# Altium PCB logger_layout.PcbDoc
Units mil, origin at the board's own origin, x right, y up, seen from the top; angles counter-clockwise.
Board outline 600 x 600 mil, 4 copper layers (Top Layer, Layer 1, Layer 2, Bottom Layer), stack 23.756 mil thick; 42 components, 77 nets, 172 pads, 1 vias.
Unrouted connection lines stored in the file: 65.
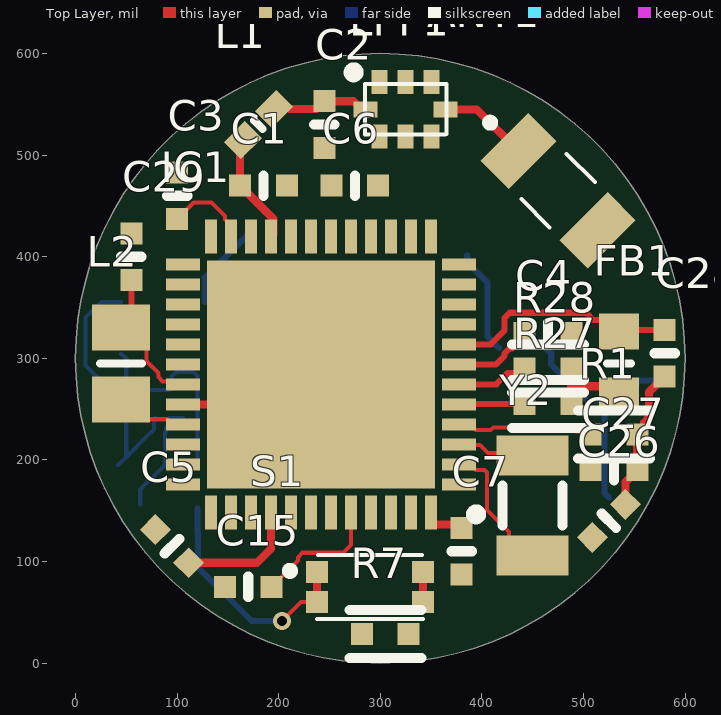
[diagram p0: Top Layer view]
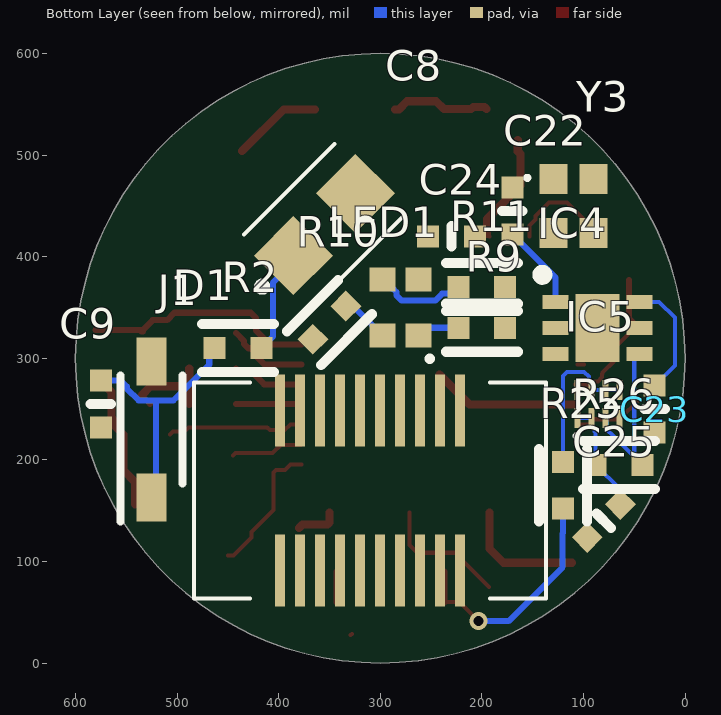
[diagram p1: Bottom Layer view, seen from below]
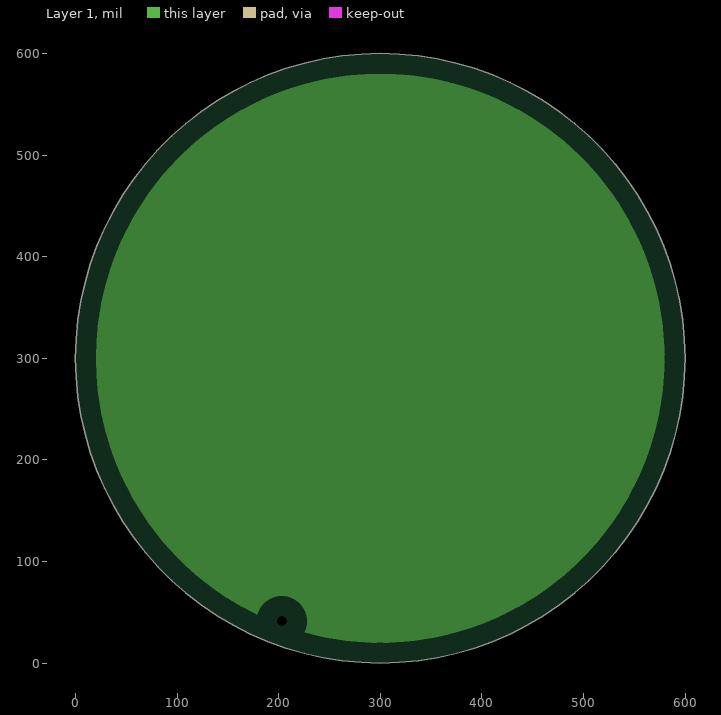
[diagram p2: Layer 1, clearances drawn from the general rule]
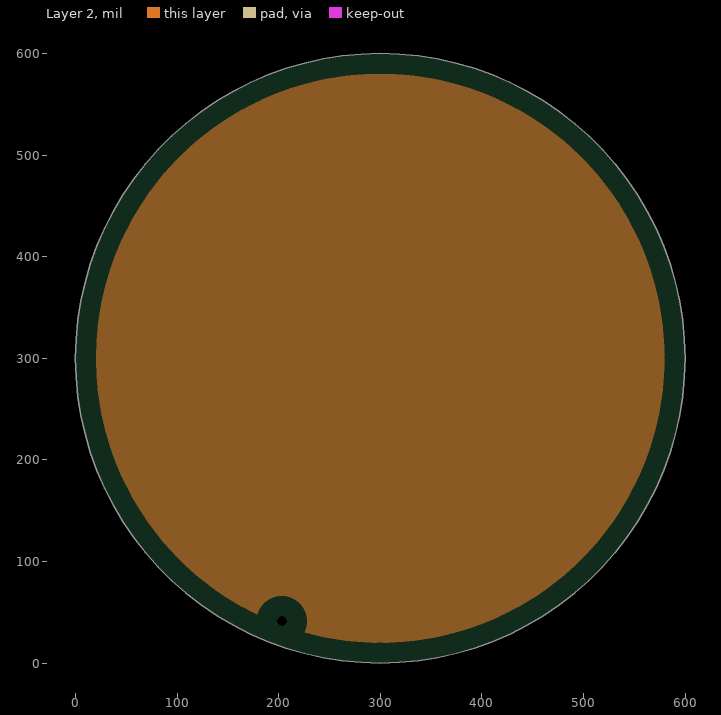
[diagram p3: Layer 2, clearances drawn from the general rule]

## Layer stack, top to bottom
Top Solder: solder mask 0.4, Solder Resist, Dk 3.5
Top Layer: signal copper 1.4
Dielectric 2: prepreg 2.8, PP-006, Dk 4.1
Layer 1: plane copper 1.378
Dielectric 1: dielectric 12.6, FR-4, Dk 4.8
Layer 2: plane copper 1.378
Dielectric 3: prepreg 2.8, PP-006, Dk 4.1
Bottom Layer: signal copper 1.4
Bottom Solder: solder mask 0.4, Solder Resist, Dk 3.5

## Board outline
300,0 cw(c300,300) 0,300 cw(c300,300) 300,600 cw(c300,300) 600,300 cw(c300,300)

## Design rules (kind name [scope] priority, off if disabled: settings)
Clearance [All] p1: gap=6 ignorepadtopadclearanceinfootprint=FALSE except(0: Arc-Hole Track-Hole SMDPad-Hole THPad-Hole Via-Hole Fill-Hole Poly-Hole Region-Hole Text-Hole)
PlaneClearance [All] p1: clearance=20
PlaneConnect [All] p1: planeconnectstyle=Relief reliefexpansion=20 reliefentries=4 reliefconductorwidth=10 reliefairgap=10
PolygonConnect [All] p1: connectstyle=Relief reliefconductorwidth=10 reliefentries=4 polygonreliefangle="90 Angle" airgapwidth=10
RoutingVias [All] p1: holewidth=9.84 width=15.75 viastyle="Through Hole" minholewidth=9.84 minwidth=15.75 maxholewidth=13.78 maxwidth=27.56
SolderMaskExpansion [All] p1: expansion=4 istentingtop=FALSE
Width [All] p1: maxlimit=8 minlimit=4 preferedwidth=6 minimp=50.000000 maximp=50.000000 favimp=50.000000
28 further rules are at their usual default settings.

## Classes and differential pairs
component class logger_connector: J1
component class logger_periph: C26 C27 C28 C29 FB1 L2 R27 R28 Y2 Y3
component class logger_sensors: C15 LED1 R7 R9 R10 R11
component class logger_power: C22 C23 C24 C25 IC4 IC5 R25 R26 S1
component class logger_mcu: ANT1 C1 C2 C3 C4 C5 C6 C7 C8 C9 D1 IC1 L1 LPF1 R1 R2

## Components (designator, comment, footprint, x,y, rotation, side; value= is the part's Value field where it differs from the comment)
ANT1 "2119640001" 2119640001 475,465 r135 top
C1 "0.80pF" SMD-0402C 185,470 r90 top
C2 "0.30pF" SMD-0402C 245,530 r180 top
C3 "0.10µF" SMD-0402C 100,460 r180 top
C4 "0.10µF" SMD-0402C 465,325 r90 top
C5 "0.10µF" SMD-0402C 95,115 r225 top
C6 "0.10µF" SMD-0402C 275,470 r90 top
C7 "100pF" SMD-0402C 380,110 r0 top
C8 "CPH3225A" CPH3225A 355,415 r135 bottom
C9 "0.10µF" SMD-0402C 575,255 r180 bottom
C15 "10000pF" SMD-0402C 170,75 r90 top
C22 "1µF" SMD-0402C 170,445 r0 bottom
C23 "1µF" SMD-0402C 30,250 r180 bottom
C24 "1µF" SMD-0402C 230,420 r270 bottom
C25 "10000pF" SMD-0402C 80,140 r45 bottom
C26 "15pF" SMD-0402C 525,140 r135 top
C27 "15pF" SMD-0402C 530,190 r90 top
C28 "0.10µF" SMD-0402C 580,305 r0 top
C29 "4.7µF" SMD-0402C 55,400 r180 top
D1 "1N5819HW-7-F" SOD3716X145N 525,230 r90 bottom
FB1 "BLM18KG601SZ1D" BEADC1608X95N 535,295 r270 top
IC1 "STM32WB55CGU6" QFN50P700X700X65-49N-D 241.73,284.17 r180 top
IC4 "NCP718BMT330TBG" SON65P200X200X80-7N 86.34,330 r180 bottom
IC5 "74LVC2G00GS,115" 74AXP2T3407GSX 85,255 r180 bottom
J1 "0529910208" 0529910208 310,170 r180 bottom
L1 "LQG15HS2N7S02D" INDC1005X55N 180,530 r45 top
L2 "LBR2012T100K" INDC2012X145N 45,295 r90 top
LED1 "EAST1616RGBB6" EAST1616RGBB6 280,350 r180 bottom
LPF1 "LFL212G45TC1A007" LFL212G45TC1A007 325,545 r0 top
R1 "100k" SMD-0402-RES 530,225 r270 top
R2 "100" SMD-0402-RES 440,310 r270 bottom
R7 "1k" SMD-0402-RES 305,28.62 r90 top
R9 "110" SMD-0402-RES 200,330 r270 bottom
R10 "30" SMD-0402-RES 350,335 r45 bottom
R11 "24" SMD-0402-RES 200,370 r90 bottom
R25 "100k" SMD-0402-RES 120,175 r180 bottom
R26 "100k" SMD-0402-RES 65,195 r90 bottom
R27 "10k" SMD-0402-RES 465,255 r90 top
R28 "10k" SMD-0402-RES 465,290 r90 top
S1 "EVP-BB4A9B000" EVPBB2A9B000 280,75 r0 top
Y2 "NX3215SA-32.768K-STD-MUA-8" NX3215SA 450,155 r90 top
Y3 "XRCGB32M000F1H01R0" XRCGB32M000F1H01R0 110,450 r270 bottom

## Footprints (in the part's own frame and the unit in brackets; to place one, negate y for a bottom-side part, rotate by r counter-clockwise, add the part's x,y. Pads: shape width x height; smd on the part's side, far side on the other; paste and mask are expansions set on the pad)
74AXP2T3407GSX [mm]
  rect 0.15x0.5 smd: 1(-0.525,-0.35) 2(-0.175,-0.35) 3(0.175,-0.35) 4(0.525,-0.35) 5(0.525,0.35) 6(0.175,0.35) 7(-0.175,0.35) 8(-0.525,0.35)
  silkscreen extent -0.6,-0.85 -0.5,-0.75, body extent -0.67,-0.5 0.67,0.5, height 0.45
0529910208 [mm]
  rect 0.25x1.8 smd: 1(-2.25,-2) 2(-2.25,2) 3(-1.75,-2) 4(-1.75,2) 5(-1.25,-2) 6(-1.25,2) 7(-0.75,-2) 8(-0.75,2) 9(-0.25,-2) 10(-0.25,2) 11(0.25,-2) 12(0.25,2) 13(0.75,-2) 14(0.75,2) 15(1.25,-2) 16(1.25,2) 17(1.75,-2) 18(1.75,2) 19(2.25,-2) 20(2.25,2)
  silkscreen extent -4.4,-2.7 4.4,2.7, body extent -4.4,-2.7 4.4,2.7, height 2.28
2119640001 [mm]
  rect 1x1.7 smd: 1(1.4,0) 2(-1.4,0)
  silkscreen extent -0.5,-0.8 2.5,0.8
BEADC1608X95N [mm]
  rect 0.9x1 smd: 1(-0.8,0) 2(0.8,0)
  silkscreen extent 0,-0.3 0,0.3, body extent -0.8,-0.4 0.8,0.4, height 0.95
CPH3225A [mm]
  rect 1.4x1.4 smd: 1(-0.8,0.3) 2(1.4,0.3)
  silkscreen extent -2,-0.95 1.9,1.55, body extent -1.36,-0.95 1.96,1.55, height 1.1
EAST1616RGBB6 [mm]
  rect 0.65x0.6 smd: 1(0.45,-0.7) 2(0.45,0.7) 3(-0.45,-0.7) 4(-0.45,0.7)
  silkscreen extent 0.73,-1.28 0.73,-1.28, body extent -0.79,-0.79 0.81,0.81, height 0.46
EVPBB2A9B000 [mm]
  rect 0.55x0.55 smd: 1(-1.075,0.375) 2(-1.075,-0.375) 3(1.575,-0.375) 4(1.575,0.375)
  silkscreen extent -1.85,-0.8 1.58,0.8
INDC1005X55N [mm]
  rect 0.75x0.6 smd: 1(-0.55,0) 2(0.55,0)
  silkscreen extent 0,-0.15 0,0.15, body extent -0.5,-0.25 0.5,0.25, height 0.55
INDC2012X145N [mm]
  rect 1.15x1.45 smd: 1(-0.9,0) 2(0.9,0)
  silkscreen extent 0,-0.53 0,0.53, body extent -1,-0.63 1,0.63, height 1.45
LFL212G45TC1A007 [mm]
  rect 0.4x0.6 smd: 1(-0.65,0.685) 2(0,0.685) 3(0.65,0.685) 5(0.65,-0.685) 6(0,-0.685) 7(-0.65,-0.685)
  rect 0.6x0.4 smd: 4(1,0) 8(-1,0)
  silkscreen extent -1.42,-0.64 1.02,1.05, body extent -1,-0.5 1,0.45, height 0.87
NX3215SA [mm]
  rect 1x1.8 smd: 1(-1.25,0) 2(1.25,0)
  silkscreen extent -0.5,-0.75 0.5,0.75
QFN50P700X700X65-49N-D [mm]
  rect 0.85x0.3 smd: 1(-3.45,2.75) 2(-3.45,2.25) 3(-3.45,1.75) 4(-3.45,1.25) 5(-3.45,0.75) 6(-3.45,0.25) 7(-3.45,-0.25) 8(-3.45,-0.75) 9(-3.45,-1.25) 10(-3.45,-1.75) 11(-3.45,-2.25) 12(-3.45,-2.75) 25(3.45,-2.75) 26(3.45,-2.25) 27(3.45,-1.75) 28(3.45,-1.25) 29(3.45,-0.75) 30(3.45,-0.25) 31(3.45,0.25) 32(3.45,0.75) 33(3.45,1.25) 34(3.45,1.75) 35(3.45,2.25) 36(3.45,2.75)
  rect 0.3x0.85 smd: 13(-2.75,-3.45) 14(-2.25,-3.45) 15(-1.75,-3.45) 16(-1.25,-3.45) 17(-0.75,-3.45) 18(-0.25,-3.45) 19(0.25,-3.45) 20(0.75,-3.45) 21(1.25,-3.45) 22(1.75,-3.45) 23(2.25,-3.45) 24(2.75,-3.45) 37(2.75,3.45) 38(2.25,3.45) 39(1.75,3.45) 40(1.25,3.45) 41(0.75,3.45) 42(0.25,3.45) 43(-0.25,3.45) 44(-0.75,3.45) 45(-1.25,3.45) 46(-1.75,3.45) 47(-2.25,3.45) 48(-2.75,3.45)
  rect 5.7x5.7 smd: 49(0,0)
  silkscreen extent -4,3.38 -3.75,3.62, body extent -3.55,-3.55 3.55,3.55, height 0.65
SMD-0402-RES [mm]
  rect 0.55x0.55 smd: 1(0,0.584) 2(0,-0.584)
  silkscreen extent -0.6,-0.9 0.6,0.9, body extent -0.28,-0.57 0.27,0.58, height 0.41
SMD-0402C [mm]
  rect 0.55x0.55 smd: 1(0,0.584) 2(0,-0.584)
  silkscreen extent -0.25,0 0.25,0, body extent -0.25,-0.51 0.25,0.51, height 0.51
SOD3716X145N [mm]
  rect 1.2x0.75 smd: 1(-1.7,0) 2(1.7,0)
  silkscreen extent -2.3,-0.77 1.35,0.77, body extent -1.85,-0.77 1.85,0.77, height 1.45
SON65P200X200X80-7N [mm]
  rect 0.65x0.35 smd: 1(-1.05,0.65) 2(-1.05,0) 3(-1.05,-0.65) 4(1.05,-0.65) 5(1.05,0) 6(1.05,0.65)
  rect 1.1x1.7 smd: 7(0,0)
  silkscreen extent -1.5,1.2 -1.25,1.45, body extent -1.05,-1 1.05,1, height 0.8
XRCGB32M000F1H01R0 [mm]
  rect 0.75x0.7 smd: 1(-0.675,-0.5) 2(0.675,-0.5) 3(0.675,0.5) 4(-0.675,0.5)
  silkscreen extent -0.75,-1.2 -0.65,-1.1

## Part data
ANT1: "Antenna", Manufacturer_Name=Molex, Mouser Part Number=N/A, Datasheet Link=https://www.molex.com/pdm_docs/sd/2119640001_sd.pdf, Height=1.2mm, Manufacturer_Part_Number=2119640001, Mouser Price/Stock=https://www.mouser.com/Search/Refine.aspx?Keyword=N%2FA
C1: library part GRM1555C1HR80BA01D, "CAP CER 0.8PF 50V NP0 0402", Digi-Key Part Number=490-6269-1-ND, Manufacturer="Murata Electronics North America", Operating Temperature="-55°C ~ 125°C", Package / Case="0402 (1005 Metric)", Ratings=-, Temperature Coefficient="C0G, NP0", Tolerance=±0.1pF, Voltage=50V, @ qty=0, Applications="General Purpose", Datasheets=http://www.murata.com/~/media/webrenewal/support/library/catalog/products/capacitor/mlcc/c02e.pdf, Factory Stock=0, Features=-, Height - Seated (Max)=-, Image=//media.digikey.com/Renders/Murata%20Renders/ZRB-SERIES-0402.jpg, Lead Spacing=-, Lead Style=-, Minimum Quantity=1, Mounting Type="Surface Mount, MLCC", Packaging="Cut Tape (CT)", Part Number=GRM1555C1HR80BA01D, Part Status=Active, Quantity Available=38847, Series=GRM, Size / Dimension="0.039\" L x 0.020\" W (1.00mm x 0.50mm)", Thickness (Max)="0.022\" (0.55mm)", Unit Price (USD)=0.1
C2: library part GRM1555C1HR30WA01D, "CAP CER 0.3PF 50V NP0 0402", Digi-Key Part Number=490-6261-1-ND, Manufacturer="Murata Electronics North America", Operating Temperature="-55°C ~ 125°C", Package / Case="0402 (1005 Metric)", Ratings=-, Temperature Coefficient="C0G, NP0", Tolerance=±0.05pF, Voltage=50V, @ qty=0, Applications="General Purpose", Datasheets=http://www.murata.com/~/media/webrenewal/support/library/catalog/products/capacitor/mlcc/c02e.pdf, Factory Stock=0, Features=-, Height - Seated (Max)=-, Image=//media.digikey.com/Renders/Murata%20Renders/ZRB-SERIES-0402.jpg, Lead Spacing=-, Lead Style=-, Minimum Quantity=1, Mounting Type="Surface Mount, MLCC", Packaging="Cut Tape (CT)", Part Number=GRM1555C1HR30WA01D, Part Status=Active, Quantity Available=61475, Series=GRM, Size / Dimension="0.039\" L x 0.020\" W (1.00mm x 0.50mm)", Thickness (Max)="0.022\" (0.55mm)", Unit Price (USD)=0.16
C3 C4 C5 C6 C9 C28: library part GCM155R71C104KA55D, "CAP CER 0.1UF 16V X7R 0402", Digi-Key Part Number=490-4759-1-ND, Manufacturer="Murata Electronics North America", Operating Temperature="-55°C ~ 125°C", Package / Case="0402 (1005 Metric)", Ratings=AEC-Q200, Temperature Coefficient=X7R, Tolerance=±10%, Voltage=16V, @ qty=0, Applications=Automotive, Datasheets=http://www.murata.com/~/media/webrenewal/support/library/catalog/products/capacitor/mlcc/c03e.ashx, Factory Stock=0, Features=-, Height - Seated (Max)=-, Image=//media.digikey.com/Renders/Murata%20Renders/ZRB-SERIES-0402.jpg, Lead Spacing=-, Lead Style=-, Minimum Quantity=1, Mounting Type="Surface Mount, MLCC", Packaging="Cut Tape (CT)", Part Number=GCM155R71C104KA55D, Part Status=Active, Quantity Available=734194, Series=GCM, Size / Dimension="0.039\" L x 0.020\" W (1.00mm x 0.50mm)", Thickness (Max)="0.022\" (0.55mm)", Unit Price (USD)=0.1
C7: library part GCM1555C1H101JA16D, "CAP CER 100PF 50V NP0 0402", Digi-Key Part Number=490-10669-1-ND, Manufacturer="Murata Electronics North America", Operating Temperature="-55°C ~ 125°C", Package / Case="0402 (1005 Metric)", Ratings=AEC-Q200, Temperature Coefficient="C0G, NP0", Tolerance=±5%, Voltage=50V, @ qty=0, Applications=Automotive, Datasheets=http://www.murata.com/~/media/webrenewal/support/library/catalog/products/capacitor/mlcc/c03e.ashx, Factory Stock=0, Features=-, Height - Seated (Max)=-, Image=//media.digikey.com/Renders/Murata%20Renders/ZRB-SERIES-0402.jpg, Lead Spacing=-, Lead Style=-, Minimum Quantity=1, Mounting Type="Surface Mount, MLCC", Packaging="Cut Tape (CT)", Part Number=GCM1555C1H101JA16D, Part Status=Active, Quantity Available=61397, Series=GCM, Size / Dimension="0.039\" L x 0.020\" W (1.00mm x 0.50mm)", Thickness (Max)="0.022\" (0.55mm)", Unit Price (USD)=0.1
C8: "Capacitor Polarised", Manufacturer_Name="Seiko Instruments Micro Energy", Mouser Part Number=628-CPH3225A, Datasheet Link=https://www.sii.co.jp/en/me/datasheets/chip-capacitor/cph3225a/, Height=1mm, Manufacturer_Part_Number=CPH3225A, Mouser Price/Stock=https://www.mouser.com/Search/Refine.aspx?Keyword=628-CPH3225A
C15 C25: library part GCM155R71H103KA55D, "CAP CER 10000PF 50V X7R 0402", Digi-Key Part Number=490-4762-1-ND, Manufacturer="Murata Electronics North America", Operating Temperature="-55°C ~ 125°C", Package / Case="0402 (1005 Metric)", Ratings=AEC-Q200, Temperature Coefficient=X7R, Tolerance=±10%, Voltage=50V, @ qty=0, Applications=Automotive, Datasheets=http://www.murata.com/~/media/webrenewal/support/library/catalog/products/capacitor/mlcc/c03e.ashx, Factory Stock=0, Features=-, Height - Seated (Max)=-, Image=//media.digikey.com/Renders/Murata%20Renders/ZRB-SERIES-0402.jpg, Lead Spacing=-, Lead Style=-, Minimum Quantity=1, Mounting Type="Surface Mount, MLCC", Packaging="Cut Tape (CT)", Part Number=GCM155R71H103KA55D, Part Status=Active, Quantity Available=650067, Series=GCM, Size / Dimension="0.039\" L x 0.020\" W (1.00mm x 0.50mm)", Thickness (Max)="0.022\" (0.55mm)", Unit Price (USD)=0.1
C22 C23 C24: library part GCM155C71A105KE38D, "CAP CER 1UF 10V X7S 0402", Digi-Key Part Number=490-13409-1-ND, Manufacturer="Murata Electronics North America", Operating Temperature="-55°C ~ 125°C", Package / Case="0402 (1005 Metric)", Ratings=AEC-Q200, Temperature Coefficient=X7S, Tolerance=±10%, Voltage=10V, @ qty=0, Applications=Automotive, Datasheets=http://www.murata.com/~/media/webrenewal/support/library/catalog/products/capacitor/mlcc/c03e.ashx, Factory Stock=0, Features=-, Height - Seated (Max)=-, Image=//media.digikey.com/Renders/Murata%20Renders/ZRB-SERIES-0402.jpg, Lead Spacing=-, Lead Style=-, Minimum Quantity=1, Mounting Type="Surface Mount, MLCC", Packaging="Cut Tape (CT)", Part Number=GCM155C71A105KE38D, Part Status=Active, Quantity Available=7240, Series=GCM, Size / Dimension="0.039\" L x 0.020\" W (1.00mm x 0.50mm)", Thickness (Max)="0.022\" (0.55mm)", Unit Price (USD)=0.12
C26 C27: library part GCM1555C1H150JA16D, "CAP CER 15PF 50V NP0 0402", Digi-Key Part Number=490-11147-1-ND, Manufacturer="Murata Electronics North America", Operating Temperature="-55°C ~ 125°C", Package / Case="0402 (1005 Metric)", Ratings=AEC-Q200, Temperature Coefficient="C0G, NP0", Tolerance=±5%, Voltage=50V, @ qty=0, Applications=Automotive, Datasheets=http://www.murata.com/~/media/webrenewal/support/library/catalog/products/capacitor/mlcc/c03e.ashx, Factory Stock=0, Features=-, Height - Seated (Max)=-, Image=//media.digikey.com/Renders/Murata%20Renders/ZRB-SERIES-0402.jpg, Lead Spacing=-, Lead Style=-, Minimum Quantity=1, Mounting Type="Surface Mount, MLCC", Packaging="Cut Tape (CT)", Part Number=GCM1555C1H150JA16D, Part Status=Active, Quantity Available=6185, Series=GCM, Size / Dimension="0.039\" L x 0.020\" W (1.00mm x 0.50mm)", Thickness (Max)="0.022\" (0.55mm)", Unit Price (USD)=0.1
C29: library part GRM153R60G475ME15D, "CAP CER 4.7UF 4V X5R 0402", Digi-Key Part Number=490-13231-1-ND, Manufacturer="Murata Electronics North America", Operating Temperature="-55°C ~ 85°C", Package / Case="0402 (1005 Metric)", Ratings=-, Temperature Coefficient=X5R, Tolerance=±20%, Voltage=4V, @ qty=0, Applications="General Purpose", Datasheets=http://psearch.en.murata.com/capacitor/product/GRM153R60G475ME15%23.pdf, Factory Stock=0, Features=-, Height - Seated (Max)=-, Image=//media.digikey.com/Renders/Murata%20Renders/ZRB-SERIES-0402.jpg, Lead Spacing=-, Lead Style=-, Minimum Quantity=1, Mounting Type="Surface Mount, MLCC", Packaging="Cut Tape (CT)", Part Number=GRM153R60G475ME15D, Part Status=Active, Quantity Available=9100, Series=GRM, Size / Dimension="0.039\" L x 0.020\" W (1.00mm x 0.50mm)", Thickness (Max)="0.013\" (0.33mm)", Unit Price (USD)=0.27
D1: "Diode", Manufacturer_Name="Diodes Inc.", Mouser Part Number=621-1N5819HW-F, RS Part Number=7082197P, Allied Price/Stock=http://www.alliedelec.com/diodes-inc-1n5819hw-7-f/70437201/, Allied_Number=70437201, Datasheet Link=http://www.diodes.com/_files/datasheets/ds30217.pdf, Height=1.45mm, Manufacturer_Part_Number=1N5819HW-7-F, Mouser Price/Stock=https://www.mouser.com/Search/Refine.aspx?Keyword=621-1N5819HW-F, RS Price/Stock=http://uk.rs-online.com/web/p/products/7082197P
FB1: "Ferrite Bead", Manufacturer_Name="Murata Electronics", Mouser Part Number=81-BLM18KG601SZ1D, Datasheet Link=http://www.murata.com/~/media/webrenewal/support/library/catalog/products/emc/emifil/c31e.ashx?la=en-gb, Height=0.95mm, Manufacturer_Part_Number=BLM18KG601SZ1D, Mouser Price/Stock=https://www.mouser.com/Search/Refine.aspx?Keyword=81-BLM18KG601SZ1D
IC1: "Integrated Circuit", Manufacturer_Name=STMicroelectronics, Mouser Part Number=511-STM32WB55CGU6, Datasheet Link=https://www.st.com/en/microcontrollers/stm32wb55cg.html, Height=0.65mm, Manufacturer_Part_Number=STM32WB55CGU6, Mouser Price/Stock=https://www.mouser.com/Search/Refine.aspx?Keyword=511-STM32WB55CGU6
IC4: "Integrated Circuit", Manufacturer_Name="ON Semiconductor", Mouser Part Number=863-NCP718BMT330TBG, RS Part Number=1861278, Datasheet Link=https://componentsearchengine.com/Datasheets/1/NCP718BMT330TBG.pdf, Height=0.8mm, Manufacturer_Part_Number=NCP718BMT330TBG, Mouser Price/Stock=https://www.mouser.com/Search/Refine.aspx?Keyword=863-NCP718BMT330TBG, RS Price/Stock=http://uk.rs-online.com/web/p/products/1861278
IC5: "Integrated Circuit", Manufacturer_Name=Nexperia, Datasheet Link=https://assets.nexperia.com/documents/data-sheet/74LVC2G00.pdf, Height=0.35mm, Manufacturer_Part_Number=74LVC2G00GS,115
J1: "Connector", Manufacturer_Name=Molex, Datasheet Link=https://www.molex.com/pdm_docs/sd/529910208_sd.pdf, Height=2.47mm, Manufacturer_Part_Number=0529910208
L1: "Inductor", Manufacturer_Name="Murata Electronics", Datasheet Link=https://www.arrow.com/en/products/lqg15hs2n7s02d/murata-manufacturing, Height=0.55mm, Manufacturer_Part_Number=LQG15HS2N7S02D
L2: "Inductor", Manufacturer_Name="TAIYO YUDEN", Mouser Part Number=963-LBR2012T100K, Datasheet Link=https://componentsearchengine.com/Datasheets/2/LBR2012T100K.pdf, Height=1.45mm, Manufacturer_Part_Number=LBR2012T100K, Mouser Price/Stock=https://www.mouser.com/Search/Refine.aspx?Keyword=963-LBR2012T100K
R1: library part ERJ-2RKF1003X, "RES SMD 100K OHM 1% 1/10W 0402", Digi-Key Part Number=P100KLCT-ND, Manufacturer="Panasonic Electronic Components", Operating Temperature="-55°C ~ 155°C", Package / Case="0402 (1005 Metric)", Power (Watts)="0.1W, 1/10W", Supplier Device Package=0402, Temperature Coefficient=±100ppm/°C, Tolerance=±1%, @ qty=1500, Composition="Thick Film", Datasheets=http://industrial.panasonic.com/www-cgi/jvcr13pz.cgi?E+PZ+3+AOA0002+ERJ2RKF1003X+7+WW, Factory Stock=0, Failure Rate=-, Features="Automotive AEC-Q200", Height - Seated (Max)="0.016\" (0.40mm)", Image=//media.digikey.com/Photos/Panasonic%20Photos/ERJ-PA2-Series.jpg, Minimum Quantity=1, Number of Terminations=2, Packaging="Cut Tape (CT)", Part Number=ERJ-2RKF1003X, Part Status=Active, Quantity Available=2645965, Series=ERJ, Size / Dimension="0.039\" L x 0.020\" W (1.00mm x 0.50mm)", Unit Price (USD)=0.00496
R2: library part ERJ-2RKF1003X, "RES SMD 100 OHM 5% 1/4W 0603", Digi-Key Part Number=P100KLCT-ND, Manufacturer="Panasonic Electronic Components", Operating Temperature="-55°C ~ 155°C", Package / Case="0603 (1608 Metric)", Power (Watts)="0.1W, 1/10W", Supplier Device Package=0603, Temperature Coefficient=±100ppm/°C, Tolerance=±1%, @ qty=1500, Composition="Thick Film", Datasheets=http://industrial.panasonic.com/www-cgi/jvcr13pz.cgi?E+PZ+3+AOA0002+ERJ2RKF1003X+7+WW, Factory Stock=0, Failure Rate=-, Features="Automotive AEC-Q200", Height - Seated (Max)="0.016\" (0.40mm)", Image=//media.digikey.com/Photos/Panasonic%20Photos/ERJ-PA2-Series.jpg, Minimum Quantity=1, Number of Terminations=2, Packaging="Cut Tape (CT)", Part Number=ERJ-2RKF1003X, Part Status=Active, Quantity Available=2645965, Series=ERJ, Size / Dimension="0.039\" L x 0.020\" W (1.00mm x 0.50mm)", Unit Price (USD)=0.00496
R7: library part ERJ-2GEJ102X, "RES SMD 1K OHM 5% 1/10W 0402", Digi-Key Part Number=P1.0KJCT-ND, Manufacturer="Panasonic Electronic Components", Operating Temperature="-55°C ~ 155°C", Package / Case="0402 (1005 Metric)", Power (Watts)="0.1W, 1/10W", Supplier Device Package=0402, Temperature Coefficient=±200ppm/°C, Tolerance=±5%, @ qty=1500, Composition="Thick Film", Datasheets=http://industrial.panasonic.com/www-cgi/jvcr13pz.cgi?E+PZ+3+AOA0001+ERJ2GEJ102X+7+WW, Factory Stock=0, Failure Rate=-, Features="Automotive AEC-Q200", Height - Seated (Max)="0.016\" (0.40mm)", Image=//media.digikey.com/Photos/Panasonic%20Photos/ERJ-PA2-Series.jpg, Minimum Quantity=1, Number of Terminations=2, Packaging="Cut Tape (CT)", Part Number=ERJ-2GEJ102X, Part Status=Active, Quantity Available=1939857, Series=ERJ, Size / Dimension="0.039\" L x 0.020\" W (1.00mm x 0.50mm)", Unit Price (USD)=0.00350
R9 R10 R11: library part ERJ-2GEJ103X, "RES SMD 110 OHM 5% 1/10W 0402", Digi-Key Part Number=P10KJCT-ND, Manufacturer="Panasonic Electronic Components", Operating Temperature="-55°C ~ 155°C", Package / Case="0402 (1005 Metric)", Power (Watts)="0.1W, 1/10W", Supplier Device Package=0402, Temperature Coefficient=±200ppm/°C, Tolerance=±5%, @ qty=1500, Composition="Thick Film", Datasheets=http://industrial.panasonic.com/www-cgi/jvcr13pz.cgi?E+PZ+3+AOA0001+ERJ2GEJ103X+7+WW, Factory Stock=0, Failure Rate=-, Features="Automotive AEC-Q200", Height - Seated (Max)="0.016\" (0.40mm)", Image=//media.digikey.com/Photos/Panasonic%20Photos/ERJ-PA2-Series.jpg, Minimum Quantity=1, Number of Terminations=2, Packaging="Cut Tape (CT)", Part Number=ERJ-2GEJ103X, Part Status=Active, Quantity Available=2560215, Series=ERJ, Size / Dimension="0.039\" L x 0.020\" W (1.00mm x 0.50mm)", Unit Price (USD)=0.00350
R25 R26: library part ERJ-2GEJ104X, "RES SMD 100K OHM 5% 1/10W 0402", Digi-Key Part Number=P100KJCT-ND, Manufacturer="Panasonic Electronic Components", Operating Temperature="-55°C ~ 155°C", Package / Case="0402 (1005 Metric)", Power (Watts)="0.1W, 1/10W", Supplier Device Package=0402, Temperature Coefficient=±200ppm/°C, Tolerance=±5%, @ qty=1500, Composition="Thick Film", Datasheets=http://industrial.panasonic.com/www-cgi/jvcr13pz.cgi?E+PZ+3+AOA0001+ERJ2GEJ104X+7+WW, Factory Stock=0, Failure Rate=-, Features="Automotive AEC-Q200", Height - Seated (Max)="0.016\" (0.40mm)", Image=//media.digikey.com/Photos/Panasonic%20Photos/ERJ-PA2-Series.jpg, Minimum Quantity=1, Number of Terminations=2, Packaging="Cut Tape (CT)", Part Number=ERJ-2GEJ104X, Part Status=Active, Quantity Available=2387986, Series=ERJ, Size / Dimension="0.039\" L x 0.020\" W (1.00mm x 0.50mm)", Unit Price (USD)=0.00350
R27 R28: library part ERJ-2GEJ103X, "RES SMD 10K OHM 5% 1/10W 0402", Digi-Key Part Number=P10KJCT-ND, Manufacturer="Panasonic Electronic Components", Operating Temperature="-55°C ~ 155°C", Package / Case="0402 (1005 Metric)", Power (Watts)="0.1W, 1/10W", Supplier Device Package=0402, Temperature Coefficient=±200ppm/°C, Tolerance=±5%, @ qty=1500, Composition="Thick Film", Datasheets=http://industrial.panasonic.com/www-cgi/jvcr13pz.cgi?E+PZ+3+AOA0001+ERJ2GEJ103X+7+WW, Factory Stock=0, Failure Rate=-, Features="Automotive AEC-Q200", Height - Seated (Max)="0.016\" (0.40mm)", Image=//media.digikey.com/Photos/Panasonic%20Photos/ERJ-PA2-Series.jpg, Minimum Quantity=1, Number of Terminations=2, Packaging="Cut Tape (CT)", Part Number=ERJ-2GEJ103X, Part Status=Active, Quantity Available=2560215, Series=ERJ, Size / Dimension="0.039\" L x 0.020\" W (1.00mm x 0.50mm)", Unit Price (USD)=0.00350
S1: "Switch", Manufacturer_Name=Panasonic, Mouser Part Number=667-EVP-BB4A9B000, Datasheet Link=https://industrial.panasonic.com/ac/cdn/e/control/switch/light-touch/catalog/sw_lt_eng_2616s.pdf, Height=0mm, Manufacturer_Part_Number=EVP-BB4A9B000, Mouser Price/Stock=https://www.mouser.com/Search/Refine.aspx?Keyword=667-EVP-BB4A9B000
Y2: "Crystal or Oscillator", Manufacturer_Name=NDK, Mouser Part Number=344-NX3215SA32768K8, Datasheet Link=http://www.ndk.com/images/products/catalog/c_NX3215SA-STD-MUA-14_e.pdf, Manufacturer_Part_Number=NX3215SA-32.768K-STD-MUA-8, Mouser Price/Stock=https://www.mouser.com/Search/Refine.aspx?Keyword=344-NX3215SA32768K8
Y3: "Crystal or Oscillator", Manufacturer_Name="Murata Electronics", Mouser Part Number=81-XRCGB32M000F1H01R, Datasheet Link=https://www.murata.com/en-eu/products/productdetail?partno=XRCGB32M000F1H01R0, Height=0.7mm, Manufacturer_Part_Number=XRCGB32M000F1H01R0, Mouser Price/Stock=https://www.mouser.com/Search/Refine.aspx?Keyword=81-XRCGB32M000F1H01R

## Via types
v1: diameter 17.72, hole 9.84, Top Layer to Bottom Layer, 1 vias

## Nets (pads, with @x,y where several pads share a name; then routed paths per layer and width w, separated by ;. In a path a pad name is that pad's centre, name@x,y a point inside that pad or via, vN(x,y) a via of type N, cw(c..) or ccw(c..) an arc to the next point about the centre after c; other vN are vias at no path point)
3.3V: C3.1 C5.1 C6.1 C7.1 C22.1 D1.2 FB1.2 IC1.20 IC1.23 IC1.34 IC1.35 IC1.40 IC1.48 IC4.1 J1.3 J1.18 LED1.2 R27.2 R28.2 | length 428.8
  Top Layer w4: C3.1 116.42,453.42 134,453.42 147.37,440.05 147.37,436.61 153.15,430.83 IC1.23
  Top Layer w6: FB1.2@526.5,255 FB1.2
  Top Layer w8: C5.1 178.74,98.74 192.52,112.52 IC1.40 ; IC1.48 350,138.45 351.91,136.54 361.8,136.54 361.86,136.49 376.51,136.49 C7.1 ; R27.2 488,272.5 ; R28.2 488,272.5 ; FB1.2 526,272.5 488,272.5
  Bottom Layer w6: IC4.1 127.68,379.68 C22.1
3.3V_IMU: 
3.3V_MIC: 
3.3V_PWR: 
3.3V_TP: 
5V: 
BLUE_LED: IC1.42 R11.2
BOOT0: IC1.4 R1.2 | length 135.8
  Top Layer w4: IC1.4 388.39,234.96 394.17,229.18 408.54,229.18 411.25,231.9 488.75,231.9 492.52,228.13 503.87,228.13 R1.2
GND: ANT1.2 C1.2 C2.1 C3.2 C4.2 C5.2 C7.2 C8.2 C9.2 C15.1 C22.2 C23.2 C24.2 C25.1 C26.2 C27.2 C28.2 C29.2 IC1.22 IC1.32 IC1.49 IC4.3 IC4.7 IC5.4 J1.2 J1.19 LPF1.1 LPF1.3 LPF1.5 LPF1.7 R1.1 | length 289.8
  Top Layer w8: IC1.32 212.2,254.65 IC1.49 ; C26.2 541.26,178.26 C27.2 R1.1 559.83,231.83 559.83,236.79 564.69,241.65 564.69,266.69 C28.2
GREEN_LED: IC1.11 R10.1
I2C1_SCL: IC1.5 J1.5 R27.1 | length 64.6
  Top Layer w6: IC1.5 377.91,255 R27.1
I2C1_SDA: IC1.6 J1.4 R28.1 | length 70.9
  Top Layer w6: IC1.6 414.33,274.33 425.69,285.69 437.69,285.69 R28.1
I2S_FS: 
I2S_MCLK: IC1.12
I2S_SCK: 
I2S_SD: IC1.36
IMU_CLK_IN: 
IMU_CLK_OUT: 
IMU_EN: IC1.19 J1.11
IMU_INT: IC1.28 J1.14
LIGHT_INT: IC1.30 J1.10 | length 6.2
  Top Layer w4: IC1.30@99.68,294.02 IC1.30
MIC_EN: IC1.9 J1.7
MIC_ENV: IC1.10 J1.8
MIC_SIG: IC1.13
NetAC1_4: 
NetAC1_9: 
NetAC1_17: 
NetANT1_1: ANT1.1 LPF1.4 | length 88.6
  Top Layer w8: LPF1.4 395,545 ANT1.1
NetC2_2: C2.2 L1.2 LPF1.8 | length 98.5
  Top Layer w8: L1.2 197.4,547.4 208.45,547.4 210.53,545.31 237.31,545.31 C2.2 273.69,553 281.69,545 LPF1.8
NetC8_1: C8.1 R2.1 | length 104.1
  Bottom Layer w6: C8.1 385.62,394.38 405.62,374.38 405.62,321.38 R2.1
NetC16_1: 
NetC17_2: 
NetC18_1: 
NetC18_2: 
NetC23_1: C23.1 IC4.6 | length 116.7
  Bottom Layer w4: C23.1 10,293 10,340 25.59,355.59 IC4.6
NetC24_1: C24.1 R25.2 S1.1 S1.2 | length 234.3
  Top Layer w4: v1@203.13,41.25 222.11,60.24 S1.2
  Top Layer w8: S1.2 S1.1
  Bottom Layer w6: R25.2 120,128.04 120.58,127.46 120.58,94.42 173.75,41.25 v1(203.13,41.25)
NetC25_2: C25.2 IC5.1 IC5.2 R26.1 S1.3 S1.4 | length 139.9
  Top Layer w8: S1.3 S1.4
  Bottom Layer w4: C25.2 63.74,170.74 R26.1 88,227 89.06,228.06 89.06,231.5 91.89,234.33 IC5.2 IC5.1
NetD2_2: 
NetDS1_1: 
NetDS1_2: 
NetIC1_17: IC1.17
NetIC1_18: IC1.18
NetIC2_2: 
NetIC2_3: 
NetIC2_6: 
NetIC3_8: 
NetIC5_5: IC5.5 IC5.6 IC5.7 R25.1 | length 155.4
  Bottom Layer w4: IC5.5 IC5.6 IC5.7 91.89,275.67 94.72,278.5 94.72,281.94 99.4,286.62 116.03,286.62 120,282.66 R25.1
NetLED1_1: LED1.1 R9.2 | length 42.4
  Bottom Layer w6: R9.2 254.72,330 LED1.1
NetLED1_3: LED1.3 R10.2 | length 48.5
  Bottom Layer w6: LED1.3 298.7,322.44 307.51,331.25 307.51,332.24 326.54,351.26 R10.2
NetLED1_4: LED1.4 R11.1 | length 90.7
  Bottom Layer w6: R11.1 229.44,363.56 238.94,363.56 245.76,356.75 278.81,356.75 284.08,362.02 284.08,365.23 287.59,368.75 288.91,368.75 LED1.4
NetP1_1: R7.2 | length 1.6
  Top Layer w4: R7.2 R7.2@329.11,27.52
NetP2_1: 
NRST: C4.1 IC1.7 | length 80.4
  Top Layer w6: IC1.7 414.02,294.02 422.17,302.17 422.17,304.55 427.45,309.83 429.83,309.83 434.17,314.17 434.17,317.17 C4.1
PWR_EN: IC4.4 IC5.3 R26.2 | length 164.9
  Bottom Layer w4: R26.2 R26.2@50,203 ; IC4.4 45.11,304.41 50,299.52 R26.2@50,203 ; IC5.3 77.16,240.27 77.16,229.94 70.6,223.38 70.38,223.38 R26.2@50,203
RCC_OSC32_IN: C26.1 IC1.2 Y2.1 | length 134.5
  Top Layer w4: IC1.2 388.39,195.59 393.98,190 402.66,190 405,187.66 405,150.79 426.66,129.13 426.66,123.47 444.34,105.79 Y2.1
RCC_OSC32_OUT: C27.1 IC1.3 Y2.2 | length 72
  Top Layer w4: IC1.3 378.02,214.81 397.95,214.81 405.91,206.85 442.36,206.85 Y2.2@445,204.21
RCC_OSC_IN: IC1.25 Y3.3
RCC_OSC_OUT: IC1.24 Y3.1
RED_LED: IC1.43 R9.1
RF_OUT: C1.1 IC1.21 L1.1 | length 110.5
  Top Layer w4: IC1.21 IC1.21@195,422.48
  Top Layer w8: L1.1 164.69,503.64 162,500.95 C1.1 195,437 IC1.21@195,422.48
SPI1_MISO: IC1.15 J1.13
SPI1_MOSI: IC1.16 J1.9
SPI1_SCK: IC1.14 J1.17
SUPERCAP: C9.1 D1.1 IC1.1 R2.2 | length 246.3
  Bottom Layer w6: R2.2 468.31,304.69 468.31,293.69 500,262 503.51,258.49 520.59,258.49 ; D1.1 520.59,167.48 520.59,258.49 ; C9.1 555.17,278 549.33,272.16 549.33,270.15 537.67,258.49 520.59,258.49
SYS_SWCLK: IC1.41
SYS_SWDIO: IC1.39
TP_EN: IC1.45 J1.20
TP_INT: IC1.29 J1.1
TSC_G2_IO1: C15.2 IC1.44 | length 129.2
  Top Layer w4: C15.2 218.85,100.85 218.85,103.9 223.54,108.59 263.59,108.59 271.26,116.26 IC1.44
TSC_G2_IO3: IC1.46
TSC_G2_IO4: IC1.47 R7.1
USB_DN: IC1.37 J1.12
USB_DP: IC1.38 J1.16
VBAT: IC5.8 J1.6 J1.15
VDDA/VREF: C28.1 FB1.1 IC1.8 | length 234
  Top Layer w4: FB1.1@533.38,326.5 FB1.1
  Top Layer w6: IC1.8 408.7,313.7 422.17,327.17 422.17,339.55 427.45,344.83 502.55,344.83 509.83,337.55 523.94,337.55 534.19,327.3 FB1.1 ; FB1.1@533.38,326.5 534.89,328 C28.1
VFBSMPS: C29.1 IC1.31 L2.2 | length 156.3
  Top Layer w4: L2.2@55,340.43 L2.2 49.36,330.43 70,309.8 70,297.06 81.17,285.89 81.17,284.8 81.54,284.43 81.54,281.55 85.77,277.32 102.92,277.32 IC1.31
  Top Layer w6: L2.2@55,340.43 C29.1
  Top Layer w8: IC1.31@95,272.43 96.91,274.33 IC1.31
VLXSMPS: IC1.33 L2.1 | length 71.1
  Top Layer w4: L2.1 64.57,240 90.04,240 95.08,234.96 IC1.33
pads on no net: C6.2 IC1.26 IC1.27 IC4.2 IC4.5 LPF1.2 LPF1.6 Y3.2 Y3.4

## Polygon pours and split planes (outlines as drawn)
no net on Layer 1 (split plane): 314.65,579.61 329.27,578.46 343.8,576.55 358.21,573.88 372.47,570.46 386.52,566.29 400.34,561.4 413.88,555.79 427.12,549.48 440,542.48 452.5,534.82 464.58,526.52 476.21,517.6 487.35,508.08 497.99,497.99 508.08,487.35 517.6,476.21 526.52,464.58 534.82,452.5 542.48,440 549.48,427.12 555.79,413.88 561.4,400.34 566.29,386.52 570.46,372.47 573.88,358.21 576.55,343.8 578.46,329.27 579.61,314.65 579.98,300.74 579.9,300 579.98,299.26 579.61,285.35 578.46,270.73 576.55,256.2 573.88,241.79 570.46,227.53 566.29,213.48 561.4,199.66 555.79,186.12 549.48,172.88 542.48,160 534.82,147.5 526.52,135.42 517.6,123.79 508.08,112.65 497.99,102.01 487.35,91.92 476.21,82.4 464.58,73.48 452.5,65.18 440,57.52 427.12,50.52 413.88,44.21 400.34,38.6 386.52,33.71 372.47,29.54 358.21,26.12 343.8,23.45 329.27,21.54 314.65,20.39 300.74,20.02 300,20.1 299.26,20.02 285.35,20.39 270.73,21.54 256.2,23.45 241.79,26.12 227.53,29.54 213.48,33.71 199.66,38.6 186.12,44.21 172.88,50.52 160,57.52 147.5,65.18 135.42,73.48 123.79,82.4 112.65,91.92 102.01,102.01 91.92,112.65 82.4,123.79 73.48,135.42 65.18,147.5 57.52,160 50.52,172.88 44.21,186.12 38.6,199.66 33.71,213.48 29.54,227.53 26.12,241.79 23.45,256.2 21.54,270.73 20.39,285.35 20.02,299.26 20.1,300 20.02,300.74 20.39,314.65 21.54,329.27 23.45,343.8 26.12,358.21 29.54,372.47 33.71,386.52 38.6,400.34 44.21,413.88 50.52,427.12 57.52,440 65.18,452.5 73.48,464.58 82.4,476.21 91.92,487.35 102.01,497.99 112.65,508.08 123.79,517.6 135.42,526.52 147.5,534.82 160,542.48 172.88,549.48 186.12,555.79 199.66,561.4 213.48,566.29 227.53,570.46 241.79,573.88 256.2,576.55 270.73,578.46 285.35,579.61 299.26,579.98 300,579.9 300.74,579.98
no net on Layer 2 (split plane): 314.65,579.61 329.27,578.46 343.8,576.55 358.21,573.88 372.47,570.46 386.52,566.29 400.34,561.4 413.88,555.79 427.12,549.48 440,542.48 452.5,534.82 464.58,526.52 476.21,517.6 487.35,508.08 497.99,497.99 508.08,487.35 517.6,476.21 526.52,464.58 534.82,452.5 542.48,440 549.48,427.12 555.79,413.88 561.4,400.34 566.29,386.52 570.46,372.47 573.88,358.21 576.55,343.8 578.46,329.27 579.61,314.65 579.98,300.74 579.9,300 579.98,299.26 579.61,285.35 578.46,270.73 576.55,256.2 573.88,241.79 570.46,227.53 566.29,213.48 561.4,199.66 555.79,186.12 549.48,172.88 542.48,160 534.82,147.5 526.52,135.42 517.6,123.79 508.08,112.65 497.99,102.01 487.35,91.92 476.21,82.4 464.58,73.48 452.5,65.18 440,57.52 427.12,50.52 413.88,44.21 400.34,38.6 386.52,33.71 372.47,29.54 358.21,26.12 343.8,23.45 329.27,21.54 314.65,20.39 300.74,20.02 300,20.1 299.26,20.02 285.35,20.39 270.73,21.54 256.2,23.45 241.79,26.12 227.53,29.54 213.48,33.71 199.66,38.6 186.12,44.21 172.88,50.52 160,57.52 147.5,65.18 135.42,73.48 123.79,82.4 112.65,91.92 102.01,102.01 91.92,112.65 82.4,123.79 73.48,135.42 65.18,147.5 57.52,160 50.52,172.88 44.21,186.12 38.6,199.66 33.71,213.48 29.54,227.53 26.12,241.79 23.45,256.2 21.54,270.73 20.39,285.35 20.02,299.26 20.1,300 20.02,300.74 20.39,314.65 21.54,329.27 23.45,343.8 26.12,358.21 29.54,372.47 33.71,386.52 38.6,400.34 44.21,413.88 50.52,427.12 57.52,440 65.18,452.5 73.48,464.58 82.4,476.21 91.92,487.35 102.01,497.99 112.65,508.08 123.79,517.6 135.42,526.52 147.5,534.82 160,542.48 172.88,549.48 186.12,555.79 199.66,561.4 213.48,566.29 227.53,570.46 241.79,573.88 256.2,576.55 270.73,578.46 285.35,579.61 299.26,579.98 300,579.9 300.74,579.98

## Silkscreen, mask and mechanical layers (free items; w line width, h text height)
Mechanical Board Shape:
  circle w5: c302.5,302.5 r300